# Altium PCB 传感器板2.PcbDoc (part 2 of 2)
Units mil, origin at the board's own origin, x right, y up, seen from the top; angles counter-clockwise.
Board outline 3909.32 x 2704.64 mil, 2 copper layers (Top Layer, Bottom Layer); 96 components, 116 nets, 368 pads, 95 vias.
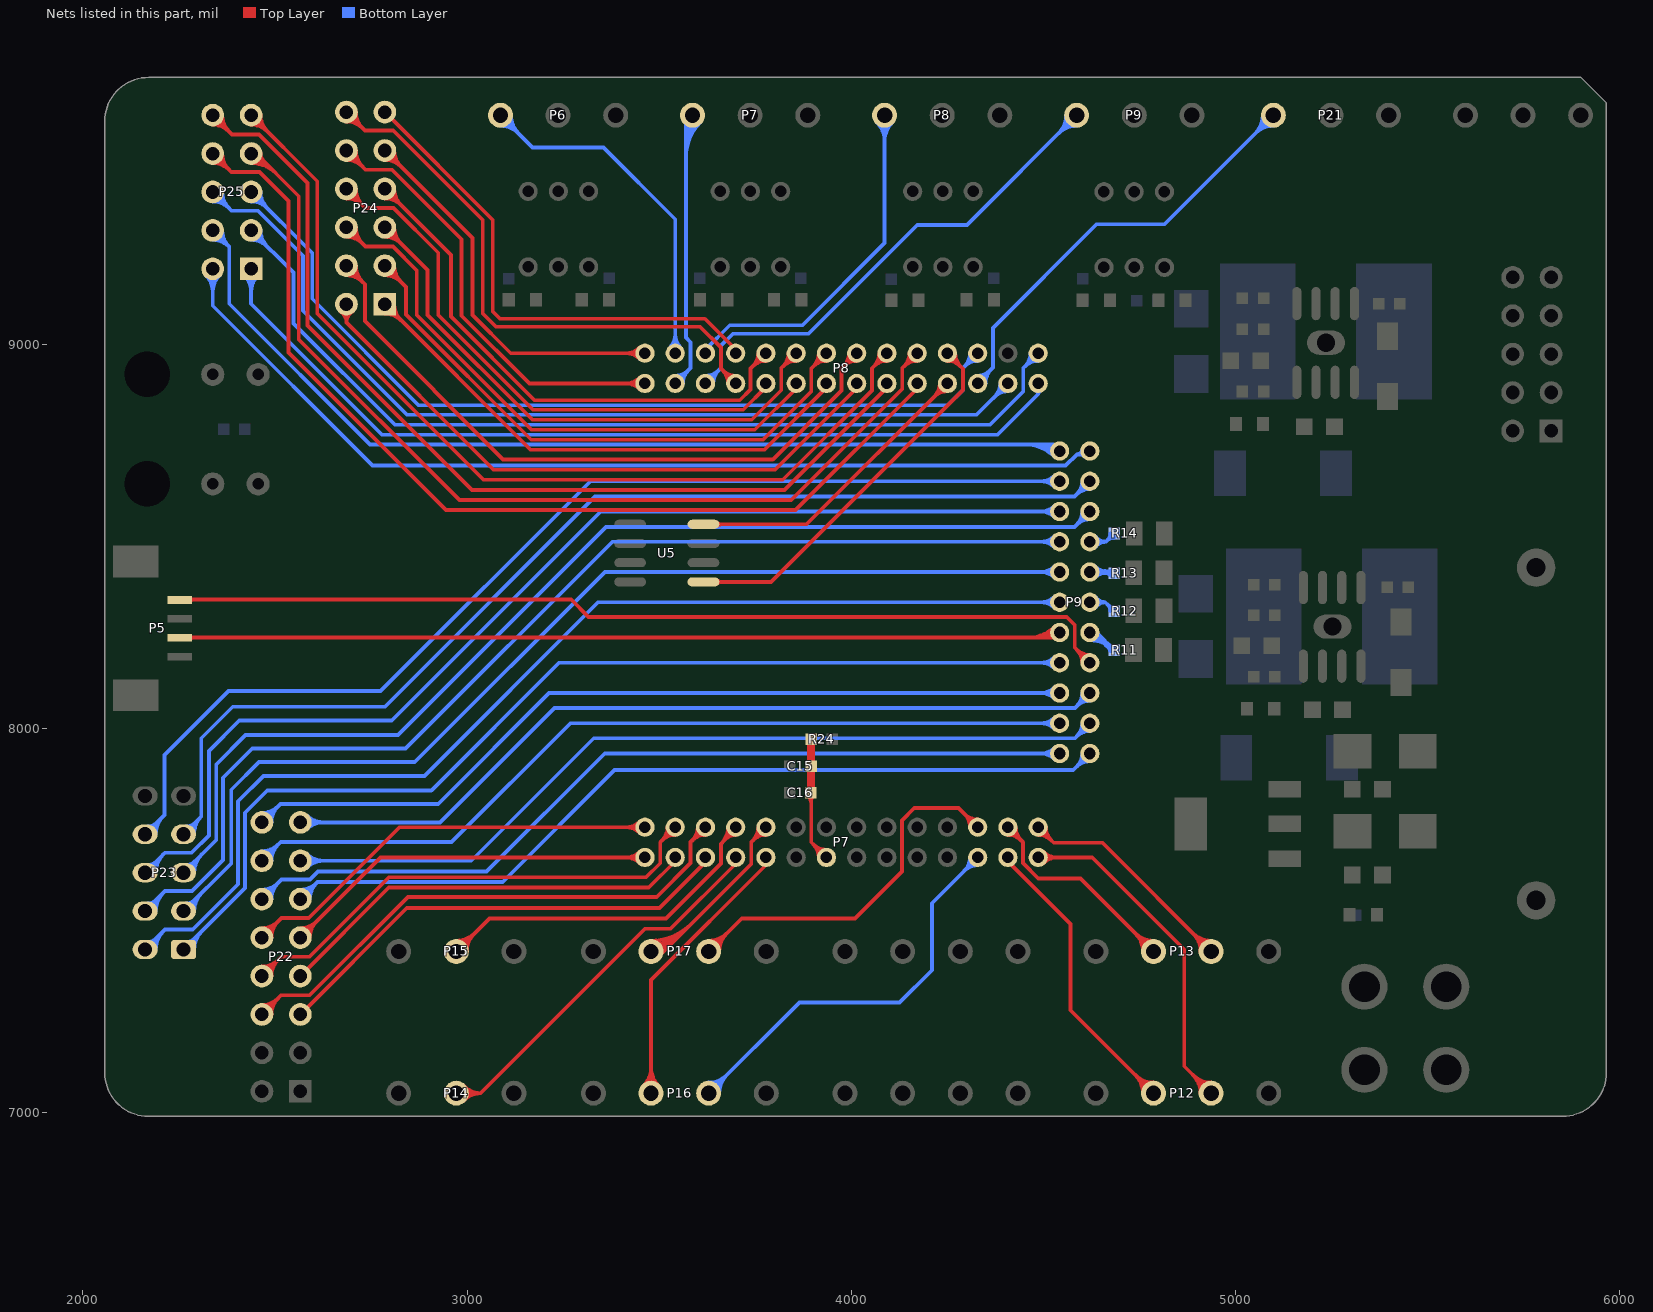
[diagram p2: the nets of this part, all layers, seen from the top]

## Via types
v1: diameter 21, hole 15, Top Layer to Bottom Layer, 67 vias
v2: diameter 19.68, hole 19.68, Top Layer to Bottom Layer, 24 vias
v3: diameter 196.85/196.85 (per signal layer), hole 137.8, Top Layer to Bottom Layer, 4 vias

## Nets (pads, with @x,y where several pads share a name; then routed paths per layer and width w, separated by ;. In a path a pad name is that pad's centre, name@x,y a point inside that pad or via, vN(x,y) a via of type N, cw(c..) or ccw(c..) an arc to the next point about the centre after c; other vN are vias at no path point) (continued)
PA9: P8.5 P21.3 | length 1387.4
  Bottom Layer w10: P8.5@4329.33,8900.63 4369,8940.3 4369,9043 4639,9313 4815.24,9313 P21.3@5099,9596.76 ; P8.5@4329.33,8918.63 ccw(c4329.33,8962.09) 4360.06,8931.36 ; P8.5@4339.33,8898.63 cw(c4368.3,8898.63) 4347.82,8919.12 ; P8.5@4349.33,8898.63 cw(c4402.44,8898.63) 4364.89,8936.19 ; P21.3@5071.5,9596.76 cw(c5005.11,9596.76) 5052.05,9549.82 cw(c5099,9502.87) P21.3@5099,9569.26 ; P21.3@5081.5,9596.76 cw(c5039.25,9596.76) 5069.13,9566.89 cw(c5099,9537.01) P21.3@5099,9579.26
PA10: P8.6 P25.5 | length 2504.4
  Bottom Layer w10: P25.5@2438,9372.47 cw(c2438,9313.26) 2479.87,9355.13 cw(c2521.74,9397) P25.5@2462.53,9397 ; P25.5@2438,9382.47 cw(c2438,9347.4) 2462.8,9372.2 cw(c2487.6,9397) P25.5@2452.53,9397 ; P25.5@2438,9397 2597,9238 2597,9119 2874,8842 4251,8842 4291,8882 4291,8939.04 P8.6@4329.33,8977.37 ; P8.6@4309.33,8977.37 cw(c4261.05,8977.37) 4295.19,8943.23 cw(c4329.33,8909.09) P8.6@4329.33,8957.37
PA11: P8.7 U5.4 | length 888.7
  Top Layer w10: U5.4@3615.47,8532 3883.96,8532 P8.7@4250.59,8898.63 ; U5.4@3649.82,8527.18 cw(c3661.44,8515.56) 3661.44,8532 cw(c3661.44,8548.44) U5.4@3649.82,8536.82 ; P8.7@4230.59,8898.63 cw(c4182.31,8898.63) 4216.45,8864.49 cw(c4250.59,8830.35) P8.7@4250.59,8878.63
PA12: P8.8 U5.1 | length 1096.4
  Top Layer w10: U5.1@3615.47,8382 3791,8382 4291,8882 4291,8936.96 P8.8@4250.59,8977.37 ; U5.1@3649.82,8377.18 cw(c3661.44,8365.56) 3661.44,8382 cw(c3661.44,8398.44) U5.1@3649.82,8386.82 ; P8.8@4250.59,8957.37 cw(c4250.59,8909.09) 4284.73,8943.23 cw(c4318.88,8977.37) P8.8@4270.59,8977.37
PA15: P8.9 P25.8 | length 2741.8
  Top Layer w10: P25.8@2338,9472.47 cw(c2338,9413.26) 2379.87,9455.13 cw(c2421.74,9497) P25.8@2362.53,9497 ; P25.8@2338,9482.47 cw(c2338,9447.4) 2362.8,9472.2 cw(c2387.6,9497) P25.8@2352.53,9497 ; P25.8@2338,9497 2386,9449 2460,9449 2535,9374 2535,8979 2945,8569 3855,8569 4171.85,8885.85 P8.9@4171.85,8898.63
PB0: P7.25 P13.2 | length 791.3
  Top Layer w10: P7.25@4408.07,7723.37 cw(c4408.07,7675.09) 4442.21,7709.23 cw(c4476.36,7743.37) P7.25@4428.07,7743.37 ; P7.25@4408.07,7743.37 4447,7704.44 4447,7650 4487,7610 4597,7610 P13.2@4787,7420 ; P13.2@4759.5,7420 ccw(c4693.11,7420) 4740.05,7466.95 ccw(c4787,7513.89) P13.2@4787,7447.5 ; P13.2@4769.5,7420 ccw(c4727.25,7420) 4757.13,7449.87 ccw(c4787,7479.75) P13.2@4787,7437.5
PB1: P7.26 P12.2 | length 941.2
  Top Layer w10: P7.26@4408.07,7664.63 4408.07,7653.93 4571,7491 4571,7267 P12.2@4787,7051 ; P12.2@4759.5,7051 ccw(c4693.11,7051) 4740.05,7097.95 ccw(c4787,7144.89) P12.2@4787,7078.5 ; P12.2@4769.5,7051 ccw(c4727.25,7051) 4757.13,7080.87 ccw(c4787,7110.75) P12.2@4787,7068.5
PB3: P8.20 P24.7 | length 1620.1
  Top Layer w10: P24.7@2786,9380.47 cw(c2786,9321.26) 2827.87,9363.13 cw(c2869.74,9405) P24.7@2810.53,9405 ; P24.7@2786,9390.47 cw(c2786,9355.4) 2810.8,9380.2 cw(c2835.6,9405) P24.7@2800.53,9405 ; P24.7@2786,9405 2958,9233 2958,9073 3176,8855 3710,8855 3738,8883 3738,8937.22 P8.20@3778.15,8977.37 ; P8.20@3758.15,8977.37 cw(c3709.87,8977.37) 3744.01,8943.23 cw(c3778.15,8909.09) P8.20@3778.15,8957.37
PB4: P8.21 P24.12 | length 1704.5
  Top Layer w10: P24.12@2686,9580.47 cw(c2686,9521.26) 2727.87,9563.13 cw(c2769.74,9605) P24.12@2710.53,9605 ; P24.12@2686,9590.47 cw(c2686,9555.4) 2710.8,9580.2 cw(c2735.6,9605) P24.12@2700.53,9605 ; P24.12@2686,9605 2734,9557 2808,9557 3041,9324 3041,9081 3076,9046 3607,9046 3661,8992 3661,8937.04 P8.21@3699.41,8898.63 ; P8.21@3679.41,8898.63 ccw(c3631.12,8898.63) 3665.27,8932.77 ccw(c3699.41,8966.91) P8.21@3699.41,8918.63
PB5: P8.22 P24.11 | length 1318.2
  Top Layer w10: P24.11@2786,9605 3067,9324 3067,9086 3086,9067 3619,9067 3699.41,8986.59 P8.22@3699.41,8977.37
PB6: P8.23 P9.3@4587,9596.76 | length 1536
  Bottom Layer w10: P8.23@3620.67,8898.63 3661,8938.96 3661,8997 3692,9028 3889,9028 4172,9311 4301.24,9311 P9.3@4587,9596.76 ; P8.23@3620.67,8918.63 ccw(c3620.67,8966.91) 3654.81,8932.77 ccw(c3688.95,8898.63) P8.23@3640.67,8898.63 ; P9.3@4559.5,9596.76 cw(c4493.11,9596.76) 4540.05,9549.82 cw(c4587,9502.87) P9.3@4587,9569.26 ; P9.3@4569.5,9596.76 cw(c4527.25,9596.76) 4557.13,9566.89 cw(c4587,9537.01) P9.3@4587,9579.26
PB7: P8.3@4087,9596.76 P8.24 | length 1093.9
  Bottom Layer w10: P8.24@3620.67,8977.37 3620.67,8986.67 3684,9050 3873,9050 4087,9264 P8.3@4087,9596.76 ; P8.3@4067.55,9577.32 cw(c4020.61,9530.37) 4087,9530.37 cw(c4153.39,9530.37) P8.3@4106.45,9577.32 ; P8.3@4074.63,9584.39 cw(c4044.75,9554.51) 4087,9554.51 cw(c4129.25,9554.51) P8.3@4099.37,9584.39
PB8: P7.3@3587,9596.76 P8.25 | length 1076.4
  Bottom Layer w10: P8.25@3541.93,8898.63 3582,8938.7 3582,9006 3570,9018 3570,9587.76 P7.3@3579,9596.76 ; P8.25@3541.93,8918.63 ccw(c3541.93,8966.91) 3576.07,8932.77 ccw(c3610.21,8898.63) P8.25@3561.93,8898.63 ; 3570,9489.33 cw(c3694.43,9489.33) P7.3@3606.45,9577.32 ; 3570,9513.47 cw(c3670.29,9513.47) P7.3@3599.37,9584.39 ; 3570,9537.62 cw(c3646.15,9537.62) P7.3@3592.3,9591.46 ; 3570,9561.76 cw(c3622.01,9561.76) P7.3@3585.23,9598.53
PB9: P6.3 P8.26 | length 1162.2
  Bottom Layer w10: P6.3@3087,9569.26 cw(c3087,9502.87) 3133.95,9549.82 cw(c3180.89,9596.76) P6.3@3114.5,9596.76 ; P6.3@3087,9579.26 cw(c3087,9537.01) 3116.87,9566.89 cw(c3146.75,9596.76) P6.3@3104.5,9596.76 ; P6.3@3087,9596.76 3170.76,9513 3355,9513 3541.93,9326.07 P8.26@3541.93,8977.37 ; P8.26@3527.79,8991.51 ccw(c3493.64,9025.65) 3541.93,9025.65 ccw(c3590.21,9025.65) P8.26@3556.07,8991.51
PB10_TX: P5.4 P9.8 | length 2559.8
  Top Layer w10: P5.4@2252,8335.82 3271.18,8335.82 3316,8291 4561,8291 4582,8270 4582,8210.89 P9.8@4621.37,8171.52 ; P5.4@2277.08,8331.39 cw(c2287.76,8320.71) 2287.76,8335.82 ; P9.8@4601.37,8171.52 ccw(c4553.09,8171.52) 4587.23,8205.66 ccw(c4621.37,8239.8) P9.8@4621.37,8191.52
PB11_RX: P5.2 P9.9 | length 2484.8
  Top Layer w10: P5.2@2253,8237 4542.63,8237 P9.9@4542.63,8250.26 cw(c4510.62,8282.27) 4510.62,8237 ; P5.2@2277.08,8232.97 cw(c2286.81,8223.24) 2286.81,8237 ; P5.2@2277.08,8239.82 ccw(c2283.88,8246.62) 2283.88,8237 ; 4462.33,8237 ccw(c4462.33,8330.56) P9.9@4528.49,8264.4 ; 4486.48,8237 ccw(c4486.48,8306.41) P9.9@4535.56,8257.33
PB12: P9.10 R11.1 | length 311
  Bottom Layer w10: P9.10@4621.37,8230.26 cw(c4621.37,8141.25) R11.1@4684.31,8204.19 ; P9.10@4621.37,8240.26 cw(c4621.37,8175.39) 4667.24,8221.26 ; 4650.17,8238.33 ccw(c4621.37,8209.53) P9.10@4621.37,8250.26 4638.24,8250.26 R11.1@4684.5,8204 ; 4663.48,8216.21 cw(c4651.29,8195.1) R11.1@4674.84,8201.41 ; 4663.77,8216.05 ccw(c4675.72,8236.75) R11.1@4681.91,8213.66 ; R11.1@4674.5,8204 ccw(c4650.36,8204) 4667.43,8221.07 ccw(c4684.5,8238.14) R11.1@4684.5,8214
PB13: P9.11 P23.2 | length 3066.5
  Bottom Layer w10: P23.2@2162,7425 2214,7477 2286,7477 2404,7595 2404,7811 2470,7877 2889,7877 3341,8329 P9.11@4542.63,8329 ; P23.2@2169.5,7445 ccw(c2169.5,7475.18) 2190.84,7453.84 ; P23.2@2179.5,7425 cw(c2221.75,7425) 2191.87,7454.87 ; P23.2@2189.5,7425 cw(c2255.89,7425) 2208.95,7471.95 ; P9.11@4528.49,8314.86 ccw(c4494.35,8280.72) 4494.35,8329 ccw(c4494.35,8377.28) P9.11@4528.49,8343.14
PB14: P9.12 R12.1 | length 166.5
  Bottom Layer w10: P9.12@4621.37,8329 4661.5,8329 ; P9.12@4637.34,8316.96 cw(c4661.5,8298.74) 4661.5,8329 ; P9.12@4637.34,8341.04 ccw(c4661.5,8359.26) 4661.5,8329 ; R12.1@4674.5,8306 ccw(c4650.36,8306) 4667.43,8323.07 ccw(c4684.5,8340.14) R12.1@4684.5,8316 ; R12.1@4684.5,8306 4661.5,8329
PB15: P9.13 P23.3 | length 2943.6
  Bottom Layer w10: P23.3@2262,7525 2386,7649 2386,7841 2458,7913 2864,7913 3358.74,8407.74 P9.13@4542.63,8407.74 ; P23.3@2269.5,7545 ccw(c2269.5,7575.18) 2290.84,7553.84 ; P23.3@2279.5,7525 cw(c2321.75,7525) 2291.87,7554.87 ; P23.3@2289.5,7525 cw(c2355.89,7525) 2308.95,7571.95 ; P9.13@4528.49,8393.6 ccw(c4494.35,8359.46) 4494.35,8407.74 ccw(c4494.35,8456.02) P9.13@4528.49,8421.88
PC0: P7.8 P14.2 | length 1148.4
  Top Layer w10: P14.2@2972,7051 3035,7051 ; P14.2@2984.83,7039.1 cw(c3012.09,7013.83) 3012.09,7051 cw(c3012.09,7088.17) P14.2@2984.83,7062.9 ; P14.2@2992.17,7032.3 cw(c3035,6992.59) 3035,7051 ; P14.2@2992.17,7069.7 ccw(c3035,7109.41) 3035,7051 ; P7.8@3699.41,7664.63 3699.41,7648.41 3530,7479 3463,7479 3035,7051
PC1: P7.7 P15.2 | length 1168.6
  Top Layer w10: P15.2@2972,7420 3058,7506 3518,7506 3661,7649 3661,7700.22 3699.41,7738.63 P7.7@3699.41,7743.37 ; P15.2@2972,7437.5 ccw(c2972,7479.75) 3001.87,7449.87 ccw(c3031.75,7420) P15.2@2989.5,7420 ; P15.2@2972,7447.5 ccw(c2972,7513.89) 3018.95,7466.95 ccw(c3065.89,7420) P15.2@2999.5,7420 ; 3661.92,7701.14 ccw(c3619.68,7743.37) P7.7@3679.41,7743.37 ; 3673.36,7712.58 cw(c3699.41,7686.53) P7.7@3699.41,7723.37 ; 3678.99,7718.21 ccw(c3653.82,7743.37) P7.7@3689.41,7743.37
PC2: P7.10 P16.2 | length 922.1
  Top Layer w10: P16.2@3459.55,7070.45 ccw(c3412.61,7117.39) 3479,7117.39 ccw(c3545.39,7117.39) P16.2@3498.45,7070.45 ; P16.2@3466.63,7063.37 ccw(c3436.75,7093.25) 3479,7093.25 ccw(c3521.25,7093.25) P16.2@3491.37,7063.37 ; P16.2@3479,7051 3479,7346 P7.10@3787.89,7654.89 ; P7.10@3778.15,7664.63 P7.10@3787.89,7654.89 ; P7.10@3792,7650.78 P7.10@3787.89,7654.89
PC3: P7.9 P17.2 | length 943.2
  Top Layer w10: P17.2@3479,7407.5 ccw(c3479,7456.99) 3514,7422 ; P17.2@3479,7417.5 ccw(c3479,7491.13) 3531.07,7439.07 ; P17.2@3479,7420 3512,7420 ; P17.2@3479,7427.5 ccw(c3479,7525.28) 3548.14,7456.14 ; P17.2@3479,7437.5 ccw(c3479,7559.42) 3565.21,7473.21 ; P17.2@3479,7447.5 ccw(c3479,7593.56) 3582.28,7490.28 ; P17.2@3506.05,7415.04 cw(c3512,7413.95) 3512,7420 ; P17.2@3506.05,7424.96 ccw(c3512,7426.05) 3512,7420 ; P7.9@3758.15,7743.37 cw(c3709.87,7743.37) 3744.01,7709.23 cw(c3778.15,7675.09) P7.9@3778.15,7723.37 ; P7.9@3778.15,7743.37 3740,7705.22 3740,7648 3512,7420
PC4: P7.23 P17.3 | length 1199.8
  Top Layer w10: P17.3@3629,7420 3715,7506 4010,7506 4132,7628 4132,7761 4164,7793 4279.7,7793 P7.23@4329.33,7743.37 ; P17.3@3629,7437.5 ccw(c3629,7479.75) 3658.87,7449.87 ccw(c3688.75,7420) P17.3@3646.5,7420 ; P17.3@3629,7447.5 ccw(c3629,7513.89) 3675.95,7466.95 ccw(c3722.89,7420) P17.3@3656.5,7420 ; P7.23@4309.33,7743.37 ccw(c4261.05,7743.37) 4295.19,7777.51 ccw(c4329.33,7811.65) P7.23@4329.33,7763.37
PC5: P7.24 P16.3 | length 1303.1
  Bottom Layer w10: P16.3@3629,7051 3865,7287 4126,7287 4210,7371 4210,7545.3 P7.24@4329.33,7664.63 ; P16.3@3629,7068.5 ccw(c3629,7110.75) 3658.87,7080.87 ccw(c3688.75,7051) P16.3@3646.5,7051 ; P16.3@3629,7078.5 ccw(c3629,7144.89) 3675.95,7097.95 ccw(c3722.89,7051) P16.3@3656.5,7051 ; P7.24@4309.33,7664.63 cw(c4261.05,7664.63) 4295.19,7630.49 cw(c4329.33,7596.35) P7.24@4329.33,7644.63
PC6: P9.22 P25.2 | length 2750.2
  Bottom Layer w10: P25.2@2320.66,9179.66 cw(c2278.79,9137.79) 2338,9137.79 cw(c2397.21,9137.79) P25.2@2355.34,9179.66 ; P25.2@2327.73,9186.73 cw(c2302.93,9161.93) 2338,9161.93 cw(c2373.07,9161.93) P25.2@2348.27,9186.73 ; P25.2@2338,9197 2338,9101.02 2754.31,8684.7 4558.37,8684.7 4587.67,8714 ; 4594.09,8714 cw(c4594.09,8695.42) P9.22@4607.23,8708.56 ; P9.22@4601.63,8725.89 cw(c4587.67,8728.14) 4587.67,8714 ; P9.22@4621.37,8722.7 4612.67,8714 4587.67,8714
PC7: P8.1@4486.81,8898.63 P25.1 | length 2524
  Bottom Layer w10: P25.1@2420.66,9179.66 cw(c2378.79,9137.79) 2438,9137.79 cw(c2497.21,9137.79) P25.1@2455.34,9179.66 ; P25.1@2427.73,9186.73 cw(c2402.93,9161.93) 2438,9161.93 cw(c2473.07,9161.93) P25.1@2448.27,9186.73 ; P25.1@2438,9197 2438,9106 2779,8765 4380.96,8765 4486.81,8870.85 ; P8.1@4480.47,8879.66 cw(c4477.52,8870.85) 4486.81,8870.85 ; P8.1@4486.81,8898.63 4486.81,8870.85 ; P8.1@4493.15,8879.66 ccw(c4496.1,8870.85) 4486.81,8870.85
PC8: P8.2@4486.81,8977.37 P25.3 | length 2672.3
  Bottom Layer w10: P25.3@2438,9272.47 cw(c2438,9213.26) 2479.87,9255.13 cw(c2521.74,9297) P25.3@2462.53,9297 ; P25.3@2438,9282.47 cw(c2438,9247.4) 2462.8,9272.2 cw(c2487.6,9297) P25.3@2452.53,9297 ; P25.3@2438,9297 2548,9187 2548,9055 2812,8791 4361,8791 4448,8878 4448,8938.56 P8.2@4486.81,8977.37 ; P8.2@4466.81,8977.37 cw(c4418.53,8977.37) 4452.67,8943.23 cw(c4486.81,8909.09) P8.2@4486.81,8957.37
PC9: P8.3@4408.07,8898.63 P25.6 | length 2651.8
  Bottom Layer w10: P25.6@2338,9372.47 cw(c2338,9313.26) 2379.87,9355.13 cw(c2421.74,9397) P25.6@2362.53,9397 ; P25.6@2338,9382.47 cw(c2338,9347.4) 2362.8,9372.2 cw(c2387.6,9397) P25.6@2352.53,9397 ; P25.6@2338,9397 2387,9348 2456,9348 2573,9231 2573,9088 2844,8817 4326.44,8817 P8.3@4408.07,8898.63 ; P8.3@4388.07,8898.63 cw(c4339.79,8898.63) 4373.93,8864.49 cw(c4408.07,8830.35) P8.3@4408.07,8878.63
PC10: P8.10 P25.7 | length 2766.1
  Top Layer w10: P25.7@2438,9472.47 cw(c2438,9381.87) 2502.06,9445.94 ; P25.7@2438,9482.47 cw(c2438,9416.02) 2484.99,9463.01 ; P25.7@2438,9492.47 cw(c2438,9450.16) 2467.92,9480.08 ; P25.7@2445,9503 2562,9386 2562,9013 2980,8595 3844,8595 4133,8884 4133,8938.52 P8.10@4171.85,8977.37 ; P25.7@2462.53,9497 ccw(c2490.36,9497) 2470.68,9477.32 ; P8.10@4151.85,8977.37 cw(c4103.57,8977.37) 4137.71,8943.23 cw(c4171.85,8909.09) P8.10@4171.85,8957.37
PC11: P8.11 P25.10 | length 2646
  Top Layer w10: P25.10@2338,9572.47 cw(c2338,9513.26) 2379.87,9555.13 cw(c2421.74,9597) P25.10@2362.53,9597 ; P25.10@2338,9582.47 cw(c2338,9547.4) 2362.8,9572.2 cw(c2387.6,9597) P25.10@2352.53,9597 ; P25.10@2338,9597 2388,9547 2458,9547 2585,9420 2585,9049 3013,8621 3826,8621 4093.11,8888.11 P8.11@4093.11,8898.63
PC12: P8.12 P25.9 | length 2644.2
  Top Layer w10: P25.9@2438,9572.47 cw(c2438,9513.26) 2479.87,9555.13 cw(c2521.74,9597) P25.9@2462.53,9597 ; P25.9@2438,9582.47 cw(c2438,9547.4) 2462.8,9572.2 cw(c2487.6,9597) P25.9@2452.53,9597 ; P25.9@2438,9597 2610,9425 2610,9081 3043,8648 3822,8648 4054,8880 4054,8938.26 P8.12@4093.11,8977.37 ; P8.12@4073.11,8977.37 cw(c4024.83,8977.37) 4058.97,8943.23 cw(c4093.11,8909.09) P8.12@4093.11,8957.37
PC13: P7.3@3541.93,7743.37 P22.8 | length 1492.4
  Top Layer w10: P22.8@2466,7356 2516,7406 2590,7406 2797,7613 3466.26,7613 3503,7649.74 3503,7704.44 P7.3@3541.93,7743.37 ; P22.8@2466,7370.53 ccw(c2466,7405.6) 2490.8,7380.8 ccw(c2515.6,7356) P22.8@2480.53,7356 ; P22.8@2466,7380.53 ccw(c2466,7439.74) 2507.87,7397.87 ccw(c2549.74,7356) P22.8@2490.53,7356 ; P7.3@3521.93,7743.37 cw(c3473.64,7743.37) 3507.79,7709.23 cw(c3541.93,7675.09) P7.3@3541.93,7723.37
PC14: P7.6 P22.5 | length 1230.9
  Top Layer w10: P22.5@2566,7256 2843,7533 3501,7533 3620.67,7652.67 P7.6@3620.67,7664.63
PC15: P7.5 P22.6 | length 1612.5
  Top Layer w10: P22.6@2466,7256 2516,7306 2590,7306 2846,7562 3494,7562 3582,7650 3582,7704.7 P7.5@3620.67,7743.37 ; P22.6@2466,7270.53 ccw(c2466,7305.6) 2490.8,7280.8 ccw(c2515.6,7256) P22.6@2480.53,7256 ; P22.6@2466,7280.53 ccw(c2466,7339.74) 2507.87,7297.87 ccw(c2549.74,7256) P22.6@2490.53,7256 ; P7.5@3600.67,7743.37 cw(c3552.38,7743.37) 3586.53,7709.23 cw(c3620.67,7675.09) P7.5@3620.67,7723.37
PD0: P8.13 P24.2 | length 1700.8
  Top Layer w10: P24.2@2671.63,9085.12 cw(c2651.3,9057) 2686,9057 ; P24.2@2686,9105 2686,9057 ; P24.2@2700.37,9085.12 ccw(c2720.7,9057) 2686,9057 ; P8.13@4014.37,8898.63 4014.37,8886.37 3802,8674 3069,8674 2686,9057
PD1: P8.14 P24.4 | length 1965.8
  Top Layer w10: P24.4@2686,9180.47 cw(c2686,9121.26) 2727.87,9163.13 cw(c2769.74,9205) P24.4@2710.53,9205 ; P24.4@2686,9190.47 cw(c2686,9155.4) 2710.8,9180.2 cw(c2735.6,9205) P24.4@2700.53,9205 ; P24.4@2686,9205 2734,9157 2734,9061 3094,8701 3796,8701 3975,8880 3975,8938 P8.14@4014.37,8977.37 ; P8.14@3994.37,8977.37 cw(c3946.09,8977.37) 3980.23,8943.23 cw(c4014.37,8909.09) P8.14@4014.37,8957.37
PD2: P8.15 P24.1 | length 1532.7
  Top Layer w10: P24.1@2786,9080.47 cw(c2786,9021.26) 2827.87,9063.13 cw(c2869.74,9105) P24.1@2810.53,9105 ; P24.1@2786,9090.47 cw(c2786,9055.4) 2810.8,9080.2 cw(c2835.6,9105) P24.1@2800.53,9105 ; P24.1@2786,9105 3165,8726 3774,8726 3935.63,8887.63 P8.15@3935.63,8898.63
PD3: P8.16 P24.3 | length 1731.7
  Top Layer w10: P24.3@2786,9180.47 cw(c2786,9121.26) 2827.87,9163.13 cw(c2869.74,9205) P24.3@2810.53,9205 ; P24.3@2786,9190.47 cw(c2786,9155.4) 2810.8,9180.2 cw(c2835.6,9205) P24.3@2800.53,9205 ; P24.3@2786,9205 2841,9150 2841,9078 3167,8752 3770,8752 3896,8878 3896,8937.74 P8.16@3935.63,8977.37 ; P8.16@3915.63,8977.37 cw(c3867.35,8977.37) 3901.49,8943.23 cw(c3935.63,8909.09) P8.16@3935.63,8957.37
PD5: P8.17 P24.6 | length 1662.7
  Top Layer w10: P24.6@2686,9280.47 cw(c2686,9221.26) 2727.87,9263.13 cw(c2769.74,9305) P24.6@2710.53,9305 ; P24.6@2686,9290.47 cw(c2686,9255.4) 2710.8,9280.2 cw(c2735.6,9305) P24.6@2700.53,9305 ; P24.6@2686,9305 2736,9255 2807,9255 2869,9193 2869,9077 3168,8778 3749,8778 3856.89,8885.89 P8.17@3856.89,8898.63
PD6: P8.18 P24.5 | length 1676.4
  Top Layer w10: P24.5@2786,9280.47 cw(c2786,9221.26) 2827.87,9263.13 cw(c2869.74,9305) P24.5@2810.53,9305 ; P24.5@2786,9290.47 cw(c2786,9255.4) 2810.8,9280.2 cw(c2835.6,9305) P24.5@2800.53,9305 ; P24.5@2786,9305 2897,9194 2897,9077 3170,8804 3741,8804 3818,8881 3818,8938.48 P8.18@3856.89,8977.37 ; P8.18@3836.89,8977.37 cw(c3788.61,8977.37) 3822.75,8943.23 cw(c3856.89,8909.09) P8.18@3856.89,8957.37
PD7: P8.19 P24.8 | length 1607.3
  Top Layer w10: P24.8@2686,9380.47 cw(c2686,9321.26) 2727.87,9363.13 cw(c2769.74,9405) P24.8@2710.53,9405 ; P24.8@2686,9390.47 cw(c2686,9355.4) 2710.8,9380.2 cw(c2735.6,9405) P24.8@2700.53,9405 ; P24.8@2686,9405 2736,9355 2809,9355 2925,9239 2925,9077 3172,8830 3719,8830 3778.15,8889.15 P8.19@3778.15,8898.63
PD8: P9.14 R13.1 | length 237.1
  Bottom Layer w10: P9.14@4621.37,8407.74 4680.76,8407.74 R13.1@4684.5,8404 ; P9.14@4635.51,8393.6 cw(c4669.65,8359.46) 4669.65,8407.74 cw(c4669.65,8456.02) P9.14@4635.51,8421.88 ; 4651.33,8407.74 cw(c4651.33,8370.83) R13.1@4677.43,8396.93 ; 4657.99,8404.61 cw(c4662.46,8387.92) R13.1@4676.42,8398.11 ; 4660.59,8410.17 ccw(c4667.04,8434.25) R13.1@4679.5,8412.66 ; 4661.66,8409.88 cw(c4655.61,8387.32) R13.1@4675.84,8399 ; 4669.39,8407.74 ccw(c4669.39,8419.11) R13.1@4677.43,8411.07
PD9: P9.15 P23.4 | length 3089.1
  Bottom Layer w10: P23.4@2162,7525 2214,7577 2284,7577 2365,7658 2365,7872 2441,7948 2840,7948 3378.48,8486.48 P9.15@4542.63,8486.48 ; P23.4@2169.5,7545 ccw(c2169.5,7575.18) 2190.84,7553.84 ; P23.4@2179.5,7525 cw(c2221.75,7525) 2191.87,7554.87 ; P23.4@2189.5,7525 cw(c2255.89,7525) 2208.95,7571.95 ; P9.15@4528.49,8472.34 ccw(c4494.35,8438.2) 4494.35,8486.48 ccw(c4494.35,8534.76) P9.15@4528.49,8500.62
PD10: P9.16 R14.1 | length 169.6
  Bottom Layer w10: P9.16@4621.37,8486.48 4662.98,8486.48 ; P9.16@4636.99,8473.99 cw(c4662.98,8453.2) 4662.98,8486.48 ; P9.16@4636.99,8498.97 ccw(c4662.98,8519.76) 4662.98,8486.48 ; R14.1@4674.5,8508 cw(c4650.36,8508) 4667.43,8490.93 cw(c4684.5,8473.86) R14.1@4684.5,8498 ; R14.1@4684.5,8508 4662.98,8486.48
PD11: P9.17 P23.6 | length 3083.8
  Bottom Layer w10: P23.6@2162,7625 2214,7677 2283,7677 2328,7722 2328,7942 2407,8021 2804,8021 3348.22,8565.22 P9.17@4542.63,8565.22 ; P23.6@2169.5,7645 ccw(c2169.5,7675.18) 2190.84,7653.84 ; P23.6@2179.5,7625 cw(c2221.75,7625) 2191.87,7654.87 ; P23.6@2189.5,7625 cw(c2255.89,7625) 2208.95,7671.95 ; P9.17@4528.49,8551.08 ccw(c4494.35,8516.94) 4494.35,8565.22 ccw(c4494.35,8613.5) P9.17@4528.49,8579.36
PD12: P9.18 P23.5 | length 3049.1
  Bottom Layer w10: P23.5@2262,7625 2347,7710 2347,7907 2423,7983 2820,7983 3362,8525 4581.15,8525 P9.18@4621.37,8565.22 ; P23.5@2269.5,7645 ccw(c2269.5,7675.18) 2290.84,7653.84 ; P23.5@2279.5,7625 cw(c2321.75,7625) 2291.87,7654.87 ; P23.5@2289.5,7625 cw(c2355.89,7625) 2308.95,7671.95 ; P9.18@4601.37,8565.22 cw(c4553.09,8565.22) 4587.23,8531.08 cw(c4621.37,8496.94) P9.18@4621.37,8545.22
PD13: P9.19 P23.8 | length 3037.5
  Bottom Layer w10: P23.8@2162,7725 2212,7775 2212,7931 2379,8098 2775,8098 3320.96,8643.96 P9.19@4542.63,8643.96 ; P23.8@2169.5,7745 ccw(c2169.5,7775.18) 2190.84,7753.84 ; P23.8@2179.5,7725 cw(c2221.75,7725) 2191.87,7754.87 ; P23.8@2189.5,7725 cw(c2255.89,7725) 2208.95,7771.95 ; P9.19@4528.49,8629.82 ccw(c4494.35,8595.68) 4494.35,8643.96 ccw(c4494.35,8692.25) P9.19@4528.49,8658.1
PD14: P9.20 P23.7 | length 3042
  Bottom Layer w10: P23.7@2262,7725 2308,7771 ; P23.7@2269.5,7745 ccw(c2269.5,7775.18) 2290.84,7753.84 ; P23.7@2279.5,7725.16 cw(c2319.81,7725.8) 2291.3,7754.3 ; P23.7@2289.5,7725.32 cw(c2352.68,7726.32) 2308,7771 ; P9.20@4601.37,8643.96 cw(c4553.09,8643.96) 4587.23,8609.82 cw(c4621.37,8575.68) P9.20@4621.37,8623.96 ; P9.20@4621.37,8643.96 4581.41,8604 3333,8604 2786,8057 2390,8057 2308,7975 2308,7771
PD15: P9.21 P25.4 | length 2873.4
  Bottom Layer w10: P25.4@2338,9272.47 cw(c2338,9213.26) 2379.87,9255.13 cw(c2421.74,9297) P25.4@2362.53,9297 ; P25.4@2338,9282.47 cw(c2338,9247.4) 2362.8,9272.2 cw(c2387.6,9297) P25.4@2352.53,9297 ; P25.4@2338,9297 2381,9254 2381,9106 2747,8740 4525.33,8740 P9.21@4542.63,8722.7 ccw(c4500.87,8680.94) 4500.87,8740 ; 4452.58,8740 cw(c4452.58,8632.65) P9.21@4528.49,8708.56 ; 4476.72,8740 cw(c4476.72,8656.8) P9.21@4535.56,8715.63
PE0: P8.27 P24.10 | length 1368.9
  Top Layer w10: P24.10@2686,9480.47 cw(c2686,9421.26) 2727.87,9463.13 cw(c2769.74,9505) P24.10@2710.53,9505 ; P24.10@2686,9490.47 cw(c2686,9455.4) 2710.8,9480.2 cw(c2735.6,9505) P24.10@2700.53,9505 ; P24.10@2686,9505 2736,9455 2805,9455 2986,9274 2986,9075 3162.37,8898.63 P8.27@3463.19,8898.63 ; P8.27@3449.05,8884.49 ccw(c3414.9,8850.35) 3414.9,8898.63 ccw(c3414.9,8946.91) P8.27@3449.05,8912.77
PE1: P8.28 P24.9 | length 1236.8
  Top Layer w10: P24.9@2786,9480.47 cw(c2786,9421.26) 2827.87,9463.13 cw(c2869.74,9505) P24.9@2810.53,9505 ; P24.9@2786,9490.47 cw(c2786,9455.4) 2810.8,9480.2 cw(c2835.6,9505) P24.9@2800.53,9505 ; P24.9@2786,9505 3014,9277 3014,9077 3113.63,8977.37 P8.28@3463.19,8977.37 ; P8.28@3449.05,8963.23 ccw(c3414.9,8929.09) 3414.9,8977.37 ccw(c3414.9,9025.65) P8.28@3449.05,8991.51
PE4: P7.2@3463.19,7664.63 P22.9 | length 1207.6
  Top Layer w10: P22.9@2566,7456 2774.63,7664.63 P7.2@3463.19,7664.63 ; P22.9@2566,7470.53 ccw(c2566,7505.6) 2590.8,7480.8 ccw(c2615.6,7456) P22.9@2580.53,7456 ; P22.9@2566,7480.53 ccw(c2566,7539.74) 2607.87,7497.87 ccw(c2649.74,7456) P22.9@2590.53,7456 ; P7.2@3449.05,7650.49 ccw(c3414.9,7616.35) 3414.9,7664.63 ccw(c3414.9,7712.91) P7.2@3449.05,7678.77
PE5: P7.1@3463.19,7743.37 P22.10 | length 1340.2
  Top Layer w10: P22.10@2466,7456 2517,7507 2588,7507 2824.37,7743.37 P7.1@3463.19,7743.37 ; P22.10@2466,7470.53 ccw(c2466,7505.6) 2490.8,7480.8 ccw(c2515.6,7456) P22.10@2480.53,7456 ; P22.10@2466,7480.53 ccw(c2466,7539.74) 2507.87,7497.87 ccw(c2549.74,7456) P22.10@2490.53,7456 ; P7.1@3449.05,7729.23 ccw(c3414.9,7695.09) 3414.9,7743.37 ccw(c3414.9,7791.65) P7.1@3449.05,7757.51
PE6: P7.4 P22.7 | length 1109.5
  Top Layer w10: P22.7@2566,7356 2796,7586 3473,7586 3541.93,7654.93 P7.4@3541.93,7664.63
PE7: P7.27 P13.3 | length 830.6
  Top Layer w10: P7.27@4486.81,7723.37 cw(c4486.81,7675.09) 4520.95,7709.23 cw(c4555.1,7743.37) P7.27@4506.81,7743.37 ; P7.27@4486.81,7743.37 4527.18,7703 4654,7703 P13.3@4937,7420 ; P13.3@4909.5,7420 ccw(c4843.11,7420) 4890.05,7466.95 ccw(c4937,7513.89) P13.3@4937,7447.5 ; P13.3@4919.5,7420 ccw(c4877.25,7420) 4907.13,7449.87 ccw(c4937,7479.75) P13.3@4937,7437.5
PE8: P7.28 P12.3 | length 1128.9
  Top Layer w10: P7.28@4486.81,7664.63 4627.37,7664.63 4867,7425 4867,7121 P12.3@4937,7051 ; P7.28@4500.95,7650.49 cw(c4535.1,7616.35) 4535.1,7664.63 cw(c4535.1,7712.91) P7.28@4500.95,7678.77 ; P12.3@4909.5,7051 ccw(c4843.11,7051) 4890.05,7097.95 ccw(c4937,7144.89) P12.3@4937,7078.5 ; P12.3@4919.5,7051 ccw(c4877.25,7051) 4907.13,7080.87 ccw(c4937,7110.75) P12.3@4937,7068.5
PE9: P9.1@4542.63,7935.3 P22.12 | length 2457.7
  Bottom Layer w10: P22.12@2466,7556 2517,7607 2591,7607 2612,7628 3051,7628 3358.3,7935.3 P9.1@4542.63,7935.3 ; P22.12@2466,7570.53 ccw(c2466,7605.6) 2490.8,7580.8 ccw(c2515.6,7556) P22.12@2480.53,7556 ; P22.12@2466,7580.53 ccw(c2466,7639.74) 2507.87,7597.87 ccw(c2549.74,7556) P22.12@2490.53,7556 ; P9.1@4528.49,7921.16 ccw(c4494.35,7887.01) 4494.35,7935.3 ccw(c4494.35,7983.58) P9.1@4528.49,7949.44
PE10: P9.2@4621.37,7935.3 P22.11 | length 2436.4
  Bottom Layer w10: P22.11@2566,7556 2611,7601 3093,7601 3384,7892 4578.07,7892 P9.2@4621.37,7935.3 ; P22.11@2566,7570.53 ccw(c2566,7605.6) 2590.8,7580.8 ccw(c2615.6,7556) P22.11@2580.53,7556 ; P22.11@2566,7580.53 ccw(c2566,7639.74) 2607.87,7597.87 ccw(c2649.74,7556) P22.11@2590.53,7556 ; P9.2@4601.37,7935.3 cw(c4553.09,7935.3) 4587.23,7901.16 cw(c4621.37,7867.01) P9.2@4621.37,7915.3
PE11: P9.3@4542.63,8014.04 P22.14 | length 2448.9
  Bottom Layer w10: P22.14@2466,7656 2515,7705 2960,7705 3269.04,8014.04 P9.3@4542.63,8014.04 ; P22.14@2466,7670.53 ccw(c2466,7705.6) 2490.8,7680.8 ccw(c2515.6,7656) P22.14@2480.53,7656 ; P22.14@2466,7680.53 ccw(c2466,7739.74) 2507.87,7697.87 ccw(c2549.74,7656) P22.14@2490.53,7656 ; P9.3@4528.49,7999.9 ccw(c4494.35,7965.75) 4494.35,8014.04 ccw(c4494.35,8062.32) P9.3@4528.49,8028.18
PE12: P9.4 P22.13 | length 2427.6
  Bottom Layer w10: P22.13@2566,7656 3011,7656 3330,7975 4582.33,7975 P9.4@4621.37,8014.04 ; P22.13@2576.27,7645.73 cw(c2601.07,7620.93) 2601.07,7656 cw(c2601.07,7691.07) P22.13@2576.27,7666.27 ; P22.13@2583.34,7638.66 cw(c2625.21,7596.79) 2625.21,7656 cw(c2625.21,7715.21) P22.13@2583.34,7673.34 ; P9.4@4601.37,8014.04 cw(c4553.09,8014.04) 4587.23,7979.9 cw(c4621.37,7945.75) P9.4@4621.37,7994.04
PE13: P9.5 P22.16 | length 2440.1
  Bottom Layer w10: P22.16@2466,7756 2514,7804 2925,7804 3213.78,8092.78 P9.5@4542.63,8092.78 ; P22.16@2466,7770.53 ccw(c2466,7805.6) 2490.8,7780.8 ccw(c2515.6,7756) P22.16@2480.53,7756 ; P22.16@2466,7780.53 ccw(c2466,7839.74) 2507.87,7797.87 ccw(c2549.74,7756) P22.16@2490.53,7756 ; P9.5@4528.49,8078.64 ccw(c4494.35,8044.5) 4494.35,8092.78 ccw(c4494.35,8141.06) P9.5@4528.49,8106.92
PE14: P9.6 P22.15 | length 2418.8
  Bottom Layer w10: P22.15@2566,7756 2930,7756 3228,8054 4582.59,8054 P9.6@4621.37,8092.78 ; P22.15@2576.27,7745.73 cw(c2601.07,7720.93) 2601.07,7756 cw(c2601.07,7791.07) P22.15@2576.27,7766.27 ; P22.15@2583.34,7738.66 cw(c2625.21,7696.79) 2625.21,7756 cw(c2625.21,7815.21) P22.15@2583.34,7773.34 ; P9.6@4601.37,8092.78 cw(c4553.09,8092.78) 4587.23,8058.64 cw(c4621.37,8024.5) P9.6@4621.37,8072.78
PE15: P9.7 P23.1 | length 2889.5
  Bottom Layer w10: P23.1@2262,7425 2422,7585 2422,7781 2480,7839 2907,7839 3239.52,8171.52 P9.7@4542.63,8171.52 ; P23.1@2269.5,7445 ccw(c2269.5,7475.18) 2290.84,7453.84 ; P23.1@2279.5,7425 cw(c2321.75,7425) 2291.87,7454.87 ; P23.1@2289.5,7425 cw(c2355.89,7425) 2308.95,7471.95 ; P9.7@4528.49,8157.38 ccw(c4494.35,8123.24) 4494.35,8171.52 ccw(c4494.35,8219.8) P9.7@4528.49,8185.66
VREF+: C15.1 C16.1 P7.14 R24.2 | length 438.6
  Top Layer w10: C16.1@3887.43,7825.93 cw(c3867,7805.5) 3895.89,7805.5 ; C16.1@3892.5,7834 C16.1@3893.89,7832.61 ; 3895.89,7812.21 cw(c3915.29,7812.21) C16.1@3901.57,7825.93 ; C16.1@3895.89,7831.61 3895.89,7704.37 P7.14@3935.63,7664.63 ; P7.14@3915.63,7664.63 ccw(c3867.35,7664.63) 3901.49,7698.77 ccw(c3935.63,7732.91) P7.14@3935.63,7684.63
  Top Layer w20: C16.1@3892.5,7834 C16.1@3893.5,7835 ; C16.1@3895.5,7834 C15.1@3895.5,7902 R24.2@3895.5,7972
pads on no net: P3. P4. U2.2 U2.3 U2.5 U4.2 U4.3 U4.5 U5.5
copper on no net:
  other v2: 2141,7030 5821.68,7030 2221,7035 5901.68,7035 2088,7105 2254,7105 5768.68,7105 5934.68,7105 2221,7175 5901.68,7175 2141,7180 5821.68,7180 5821.68,9275 5901.68,9280 5768.68,9350 5934.68,9350 5901.68,9420 5821.68,9425 2141,9506 2221,9511 2088,9581 2254,9581 2221,9651 2141,9656
  other v3: 2171,7105 5851.68,7105 5851.68,9350 2171,9581

## Polygon pours and split planes (outlines as drawn)
GND on Top Layer "Top Layer-No Net" (solid, remove dead copper, pour order 3): 1997,9717 5944,9717 6042,9619 6027,9604 6027,6974 2079,6974 1935,7118
GND on Bottom Layer "Top Layer-No Net" (solid, remove dead copper, pour order 5): 2012,9742 2023,9753 6011,9753 6011,7030 5872,6891 5836,6927 1981,6927

## Keep-outs
Keep-Out Layer:
  the board outline again, w10

## Other copper
Top Layer:
  region net NetC3_2: 5326,8207 5326,8118 5363,8118 5363,8207
  region net NetC12_2: 5310,8945 5310,8859 5349,8859 5349,8945
  rectangle net 5V: 4856,8135 4938,8226

## Silkscreen, mask and mechanical layers (free items; w line width, h text height)
Top Overlay:
  text "PC12" at 2553,9661 h30 r270
  text "PC11" at 2503,9657 h30 r270
  text "PB4" at 2854,9640 h30 r270
  text "PB5" at 2915,9639 h30 r270
  text "PE0" at 2853,9539 h30 r270
  text "PE1" at 2915,9536 h30 r270
  text "PC10" at 2552,9535 h30 r270
  text "PA15" at 2502,9534 h30 r270
  text "PB9" at 3084,9461 h30 r180
  text "PA8" at 5621,9461 h30 r180
  text "PB8" at 3582,9459 h30 r180
  text "PB7" at 4082,9459 h30 r180
  text "G" at 4429,9458 h30 r180
  text "G" at 4924,9458 h30 r180
  text "PA9" at 5131,9458 h30 r180
  text "PB6" at 4580,9457 h30 r180
  text "G" at 3926,9455 h30 r180
  text "G" at 5411,9455 h30 r180
  text "G" at 3427,9454 h30 r180
  text "5V" at 5274,9454 h30 r180
  text "5V" at 5772,9452 h30 r180
  text "PD7" at 2851,9436 h30 r270
  text "PB3" at 2916,9435 h30 r270
  text "TIM1" at 5625,9418 h30 r180
  text "TIM1" at 5135,9416 h30 r180
  text "PA10" at 2552,9406 h30 r270
  text "PC9" at 2502,9404 h30 r270
  text "PD5" at 2851,9338 h30 r270
  text "PD6" at 2914,9338 h30 r270
  text "PC7" at 2499,9283 h30 r270
  text "PC8" at 2551,9282 h30 r270
  text "PD3" at 2914,9236 h30 r270
  text "PD1" at 2850,9233 h30 r270
  text "PC6" at 2501,9175 h30 r270
  text "PD15" at 2553,9175 h30 r270
  text "GND" at 5574,9162 h30
  text "PD0" at 2850,9139 h30 r270
  text "PD2" at 2911,9138 h30 r270
  text "6V" at 4663,9072 h30 r180
  text "6V" at 4250,9071 h30 r180
  text "5V" at 4445,9071 h30 r180
  text "5V" at 4860,9069 h30 r180
  text "6V" at 3672,9066 h30 r180
  text "5V" at 3858,9064 h30 r180
  text "5V" at 3358,9063 h30 r180
  text "6V" at 3169,9061 h30 r180
  text "3.3V" at 5553,9059 h30
  text "5V" at 5586,8962 h30
  text "WHU_ROBOCON" at 2865,8920 h100 r270
  text "6V" at 5586,8860 h30
  text "24V" at 5577,8760 h30
  text "CAN_L" at 2331,8577 h30 r270
  text "CAN_H" at 2443,8575 h30 r270
  text "T" at 2308,8346 h30 r270
  text "G" at 2309,8296 h30 r270
  text "2015.12.6" at 2712,8281 h50 r270
  text "R" at 2307,8246 h30 r270
  text "V" at 2306,8199 h30 r270
  text "GND" at 2441,8057 h30
  text "3.3V" at 2551,8057 h30
  text "PD13" at 2427,8012 h30
  text "PD14" at 2553,8012 h30
  text "PD11" at 2427,7969 h30
  text "PD12" at 2554,7964 h30
  text "PD9" at 2437,7924 h30
  text "PB15" at 2552,7923 h30
  text "PB13" at 2423,7883 h30
  text "PE15" at 2551,7881 h30
  text "PE13" at 2422,7838 h30
  text "PE14" at 2552,7838 h30
  text "PE12" at 2684,7759 h30 r270
  text "PE11" at 2632,7758 h30 r270
  text "PE10" at 2685,7641 h30 r270
  text "PE9" at 2631,7638 h30 r270
  text "TIM3" at 4728,7602 h30
  text "TIM3" at 4070,7584 h30
  text "PC1" at 2948,7570 h30
  text "G" at 2811,7569 h30
  text "5V" at 3102,7569 h30
  text "G" at 3314,7568 h30
  text "PC3" at 3437,7568 h30
  text "PC4" at 3599,7567 h30
  text "5V" at 3755,7567 h30
  text "PB0" at 4742,7566 h30
  text "PE7" at 4905,7566 h30
  text "5V" at 5061,7566 h30
  text "G" at 3974,7565 h30
  text "PA4" at 4247,7565 h30
  text "5V" at 4415,7565 h30
  text "G" at 4629,7565 h30
  text "PA6" at 4084,7549 h30
  text "PE5" at 2630,7526 h30 r270
  text "PE4" at 2685,7526 h30 r270
  text "PC13" at 2632,7429 h30 r270
  text "PE6" at 2683,7426 h30 r270
  text "PC15" at 2631,7310 h30 r270
  text "PC14" at 2684,7310 h30 r270
  text "TIM3" at 4080,7217 h30
  text "TIM3" at 4738,7217 h30
  text "G" at 3319,7201 h30
  text "PC2" at 3442,7201 h30
  text "G" at 2813,7200 h30
  text "PC5" at 3590,7200 h30
  text "PC0" at 2937,7199 h30
  text "G" at 4625,7198 h30
  text "5V" at 3755,7197 h30
  text "G" at 3973,7196 h30
  text "5V" at 4412,7196 h30
  text "PE8" at 4899,7196 h30
  text "PA5" at 4244,7195 h30
  text "5V" at 5063,7195 h30
  text "PA0" at 2684,7188 h30 r270
  text "PA1" at 2630,7186 h30 r270
  text "PB1" at 4758,7181 h30
  text "PA7" at 4095,7180 h30
  text "PA3" at 2629,7095 h30 r270
  text "PA2" at 2684,7095 h30 r270

## Text inside footprints (layer, text, board x,y; h text height)
P22: Top Overlay "16" at 2492,7700 h50 r90; Top Overlay "15" at 2587,7707 h50 r90; Top Overlay "1" at 2587,7045 h50 r90; Top Overlay "2" at 2484,7048 h50 r90
P24: Top Overlay "2" at 2709,9096 h50 r90; Top Overlay "1" at 2808,9105 h50 r90; Top Overlay "1" at 2798,9584 h50 r90; Top Overlay "1" at 2801,9605 h50 r90; Top Overlay "12" at 2707,9558 h50 r90
P25: Top Overlay "2" at 2362,9183 h50 r90; Top Overlay "1" at 2453,9195 h50 r90; Top Overlay "9" at 2453,9593 h50 r90; Top Overlay "10" at 2364,9542 h50 r90
P26: Top Overlay "2" at 5745,8765 h50 r90; Top Overlay "1" at 5839,8771 h50 r90; Top Overlay "9" at 5839,9163 h50 r90; Top Overlay "10" at 5748,9128 h50 r90